# EAGLE board IOB-Adapter-Input_array (EAGLE 7.7.0)
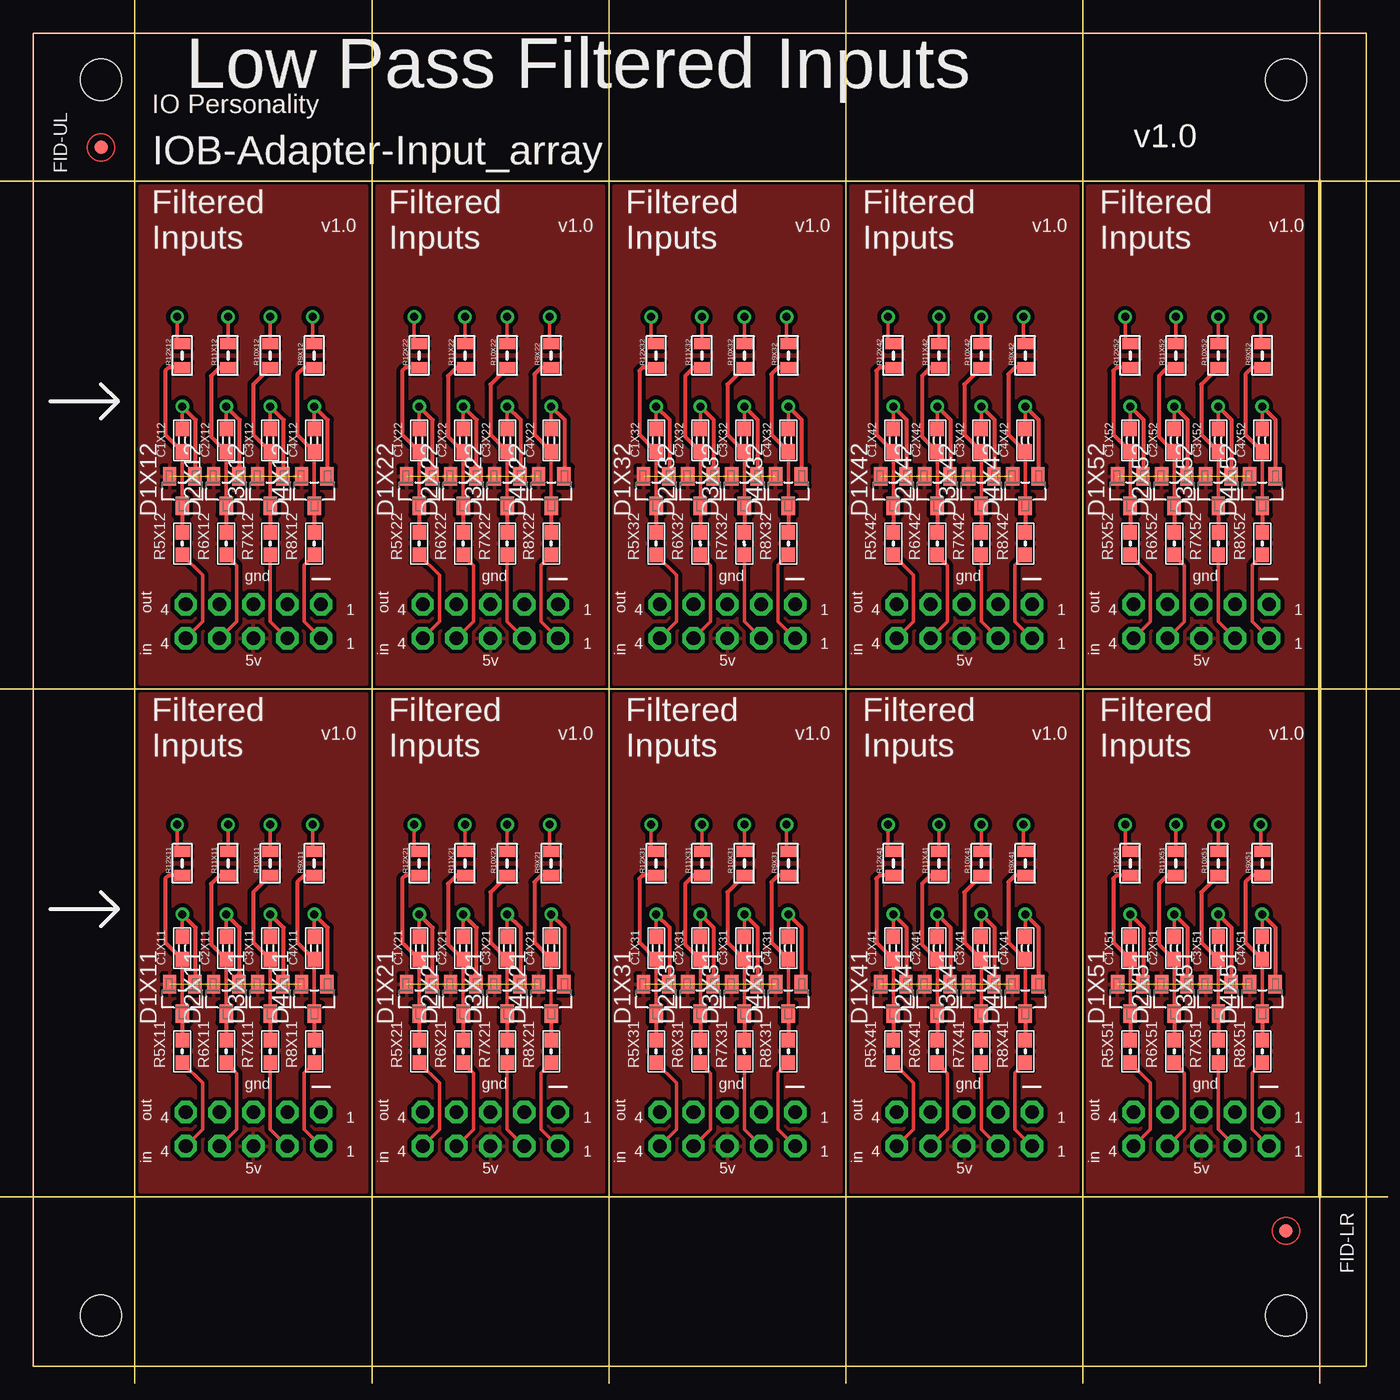
[diagram p0: board, top side]
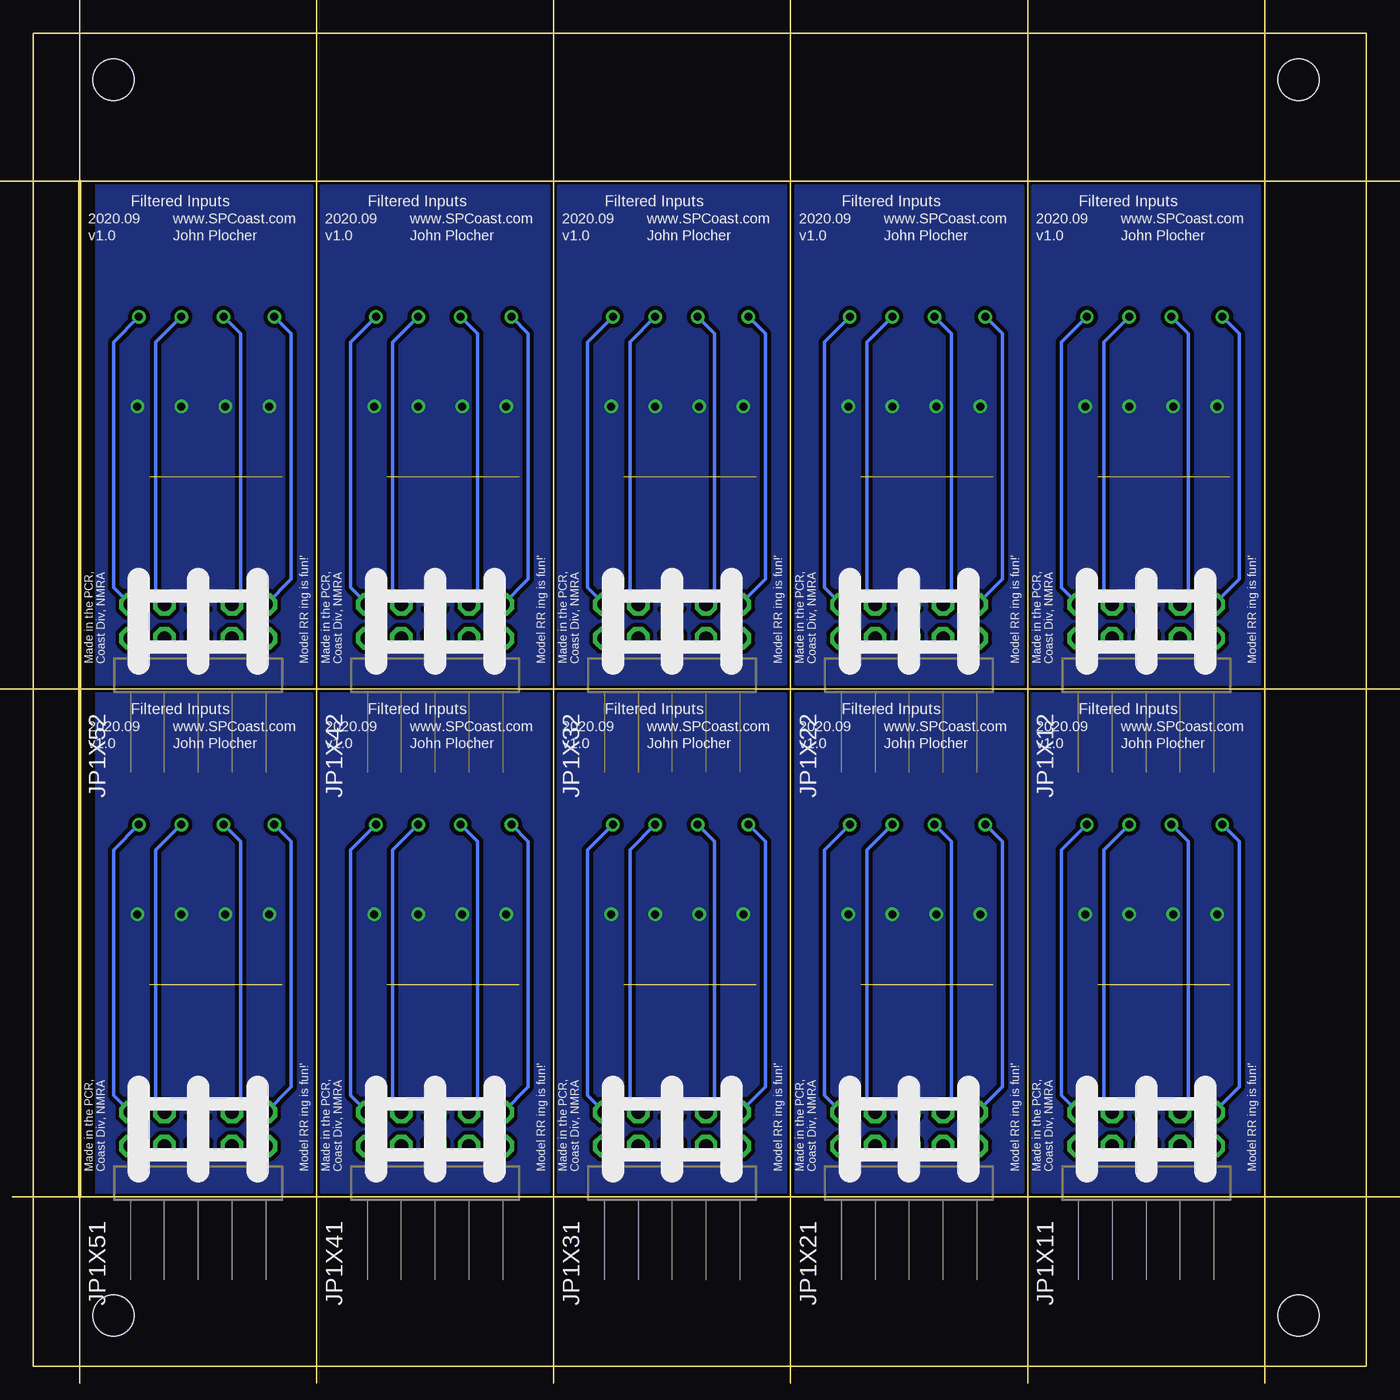
[diagram p1: board, bottom side, seen from below]

Size 100 x 100 mm. Coordinates in mm from the lower left corner, seen from the top.
Outline: 96.52,12.7 96.52,88.9
Copper layers (1*16): Top 0.035mm / dielectric 1.5mm / Bottom 0.035mm
Design rules "default": minimum track width 10mil, minimum drill 0.6mm, track to track 8mil, track to pad 8mil, pad to pad 8mil, via to via 8mil, smd to smd 8mil, copper to edge 40mil, drill to drill 8mil, minimum pad ring 10mil, minimum via ring 8mil, stop-mask expansion 4mil, vias tented up to drill 0mil, thermal gap 10mil

## Footprints (pad centres in the part's own frame; a part is rotated, then mirrored left to right if it is on the bottom)
0603-CAP = smd 1.1 x 1: 1 -0.85,0; 2 0.85,0
BOARD-DINRAIL-3.17IN-5X2-IOP = hole 3.1: 5.08,96.52; 93.98,96.52; 5.08,3.81; 93.98,3.81
SOT23 = smd 1.4 x 1: 1 1.1,-0.95; 2 1.1,0.95; 3 -1.1,0
FIDUCIAL_1MM = smd 1 x 1: 1 0,0
IOB-V3-MODULE = drill 1.016 pad 1.676 octagon: 1 -1.27,-5.08; 2 1.27,-5.08; 3 -1.27,-2.54; 4 1.27,-2.54; 5 -1.27,0; 6 1.27,0; 7 -1.27,2.54; 8 1.27,2.54; 9 -1.27,5.08; 10 1.27,5.08
0603-RES = smd 1.1 x 1: 1 -0.85,0; 2 0.85,0
0805-RES = smd 0.8 x 1.2: 1 -0.9,0; 2 0.9,0

## Placement (x,y rotation side)
C1X11  0.01uF  [0603-CAP]  11.18,31.37 90 top
C1X12  0.01uF  [0603-CAP]  11.18,69.47 90 top
C1X21  0.01uF  [0603-CAP]  28.96,31.37 90 top
C1X22  0.01uF  [0603-CAP]  28.96,69.47 90 top
C1X31  0.01uF  [0603-CAP]  46.74,31.37 90 top
C1X32  0.01uF  [0603-CAP]  46.74,69.47 90 top
C1X41  0.01uF  [0603-CAP]  64.52,31.37 90 top
C1X42  0.01uF  [0603-CAP]  64.52,69.47 90 top
C1X51  0.01uF  [0603-CAP]  82.3,31.37 90 top
C1X52  0.01uF  [0603-CAP]  82.3,69.47 90 top
C2X11  0.01uF  [0603-CAP]  14.48,31.37 90 top
C2X12  0.01uF  [0603-CAP]  14.48,69.47 90 top
C2X21  0.01uF  [0603-CAP]  32.26,31.37 90 top
C2X22  0.01uF  [0603-CAP]  32.26,69.47 90 top
C2X31  0.01uF  [0603-CAP]  50.04,31.37 90 top
C2X32  0.01uF  [0603-CAP]  50.04,69.47 90 top
C2X41  0.01uF  [0603-CAP]  67.82,31.37 90 top
C2X42  0.01uF  [0603-CAP]  67.82,69.47 90 top
C2X51  0.01uF  [0603-CAP]  85.6,31.37 90 top
C2X52  0.01uF  [0603-CAP]  85.6,69.47 90 top
C3X11  0.01uF  [0603-CAP]  17.78,31.37 90 top
C3X12  0.01uF  [0603-CAP]  17.78,69.47 90 top
C3X21  0.01uF  [0603-CAP]  35.56,31.37 90 top
C3X22  0.01uF  [0603-CAP]  35.56,69.47 90 top
C3X31  0.01uF  [0603-CAP]  53.34,31.37 90 top
C3X32  0.01uF  [0603-CAP]  53.34,69.47 90 top
C3X41  0.01uF  [0603-CAP]  71.12,31.37 90 top
C3X42  0.01uF  [0603-CAP]  71.12,69.47 90 top
C3X51  0.01uF  [0603-CAP]  88.9,31.37 90 top
C3X52  0.01uF  [0603-CAP]  88.9,69.47 90 top
C4X11  0.01uF  [0603-CAP]  21.08,31.37 90 top
C4X12  0.01uF  [0603-CAP]  21.08,69.47 90 top
C4X21  0.01uF  [0603-CAP]  38.86,31.37 90 top
C4X22  0.01uF  [0603-CAP]  38.86,69.47 90 top
C4X31  0.01uF  [0603-CAP]  56.64,31.37 90 top
C4X32  0.01uF  [0603-CAP]  56.64,69.47 90 top
C4X41  0.01uF  [0603-CAP]  74.42,31.37 90 top
C4X42  0.01uF  [0603-CAP]  74.42,69.47 90 top
C4X51  0.01uF  [0603-CAP]  92.2,31.37 90 top
C4X52  0.01uF  [0603-CAP]  92.2,69.47 90 top
CARRIER  BOARD  [BOARD-DINRAIL-3.17IN-5X2-IOP]  0,0 0 top
D1X11  BAT54S  [SOT23]  11.18,27.56 90 top
D1X12  BAT54S  [SOT23]  11.18,65.66 90 top
D1X21  BAT54S  [SOT23]  28.96,27.56 90 top
D1X22  BAT54S  [SOT23]  28.96,65.66 90 top
D1X31  BAT54S  [SOT23]  46.74,27.56 90 top
D1X32  BAT54S  [SOT23]  46.74,65.66 90 top
D1X41  BAT54S  [SOT23]  64.52,27.56 90 top
D1X42  BAT54S  [SOT23]  64.52,65.66 90 top
D1X51  BAT54S  [SOT23]  82.3,27.56 90 top
D1X52  BAT54S  [SOT23]  82.3,65.66 90 top
D2X11  BAT54S  [SOT23]  14.48,27.56 90 top
D2X12  BAT54S  [SOT23]  14.48,65.66 90 top
D2X21  BAT54S  [SOT23]  32.26,27.56 90 top
D2X22  BAT54S  [SOT23]  32.26,65.66 90 top
D2X31  BAT54S  [SOT23]  50.04,27.56 90 top
D2X32  BAT54S  [SOT23]  50.04,65.66 90 top
D2X41  BAT54S  [SOT23]  67.82,27.56 90 top
D2X42  BAT54S  [SOT23]  67.82,65.66 90 top
D2X51  BAT54S  [SOT23]  85.6,27.56 90 top
D2X52  BAT54S  [SOT23]  85.6,65.66 90 top
D3X11  BAT54S  [SOT23]  17.78,27.56 90 top
D3X12  BAT54S  [SOT23]  17.78,65.66 90 top
D3X21  BAT54S  [SOT23]  35.56,27.56 90 top
D3X22  BAT54S  [SOT23]  35.56,65.66 90 top
D3X31  BAT54S  [SOT23]  53.34,27.56 90 top
D3X32  BAT54S  [SOT23]  53.34,65.66 90 top
D3X41  BAT54S  [SOT23]  71.12,27.56 90 top
D3X42  BAT54S  [SOT23]  71.12,65.66 90 top
D3X51  BAT54S  [SOT23]  88.9,27.56 90 top
D3X52  BAT54S  [SOT23]  88.9,65.66 90 top
D4X11  BAT54S  [SOT23]  21.08,27.56 90 top
D4X12  BAT54S  [SOT23]  21.08,65.66 90 top
D4X21  BAT54S  [SOT23]  38.86,27.56 90 top
D4X22  BAT54S  [SOT23]  38.86,65.66 90 top
D4X31  BAT54S  [SOT23]  56.64,27.56 90 top
D4X32  BAT54S  [SOT23]  56.64,65.66 90 top
D4X41  BAT54S  [SOT23]  74.42,27.56 90 top
D4X42  BAT54S  [SOT23]  74.42,65.66 90 top
D4X51  BAT54S  [SOT23]  92.2,27.56 90 top
D4X52  BAT54S  [SOT23]  92.2,65.66 90 top
FID-LR  FIDUCIAL  [FIDUCIAL_1MM]  93.98,10.16 0 top
FID-UL  FIDUCIAL  [FIDUCIAL_1MM]  5.08,91.44 0 top
JP1X11  CONNECTOR-M05X2  [IOB-V3-MODULE]  16.51,17.78 270 bottom
JP1X12  CONNECTOR-M05X2  [IOB-V3-MODULE]  16.51,55.88 270 bottom
JP1X21  CONNECTOR-M05X2  [IOB-V3-MODULE]  34.29,17.78 270 bottom
JP1X22  CONNECTOR-M05X2  [IOB-V3-MODULE]  34.29,55.88 270 bottom
JP1X31  CONNECTOR-M05X2  [IOB-V3-MODULE]  52.07,17.78 270 bottom
JP1X32  CONNECTOR-M05X2  [IOB-V3-MODULE]  52.07,55.88 270 bottom
JP1X41  CONNECTOR-M05X2  [IOB-V3-MODULE]  69.85,17.78 270 bottom
JP1X42  CONNECTOR-M05X2  [IOB-V3-MODULE]  69.85,55.88 270 bottom
JP1X51  CONNECTOR-M05X2  [IOB-V3-MODULE]  87.63,17.78 270 bottom
JP1X52  CONNECTOR-M05X2  [IOB-V3-MODULE]  87.63,55.88 270 bottom
R5X11  1K0  [0603-RES]  11.18,23.62 90 top
R5X12  1K0  [0603-RES]  11.18,61.72 90 top
R5X21  1K0  [0603-RES]  28.96,23.62 90 top
R5X22  1K0  [0603-RES]  28.96,61.72 90 top
R5X31  1K0  [0603-RES]  46.74,23.62 90 top
R5X32  1K0  [0603-RES]  46.74,61.72 90 top
R5X41  1K0  [0603-RES]  64.52,23.62 90 top
R5X42  1K0  [0603-RES]  64.52,61.72 90 top
R5X51  1K0  [0603-RES]  82.3,23.62 90 top
R5X52  1K0  [0603-RES]  82.3,61.72 90 top
R6X11  1K0  [0603-RES]  14.48,23.62 90 top
R6X12  1K0  [0603-RES]  14.48,61.72 90 top
R6X21  1K0  [0603-RES]  32.26,23.62 90 top
R6X22  1K0  [0603-RES]  32.26,61.72 90 top
R6X31  1K0  [0603-RES]  50.04,23.62 90 top
R6X32  1K0  [0603-RES]  50.04,61.72 90 top
R6X41  1K0  [0603-RES]  67.82,23.62 90 top
R6X42  1K0  [0603-RES]  67.82,61.72 90 top
R6X51  1K0  [0603-RES]  85.6,23.62 90 top
R6X52  1K0  [0603-RES]  85.6,61.72 90 top
R7X11  1K0  [0603-RES]  17.78,23.62 90 top
R7X12  1K0  [0603-RES]  17.78,61.72 90 top
R7X21  1K0  [0603-RES]  35.56,23.62 90 top
R7X22  1K0  [0603-RES]  35.56,61.72 90 top
R7X31  1K0  [0603-RES]  53.34,23.62 90 top
R7X32  1K0  [0603-RES]  53.34,61.72 90 top
R7X41  1K0  [0603-RES]  71.12,23.62 90 top
R7X42  1K0  [0603-RES]  71.12,61.72 90 top
R7X51  1K0  [0603-RES]  88.9,23.62 90 top
R7X52  1K0  [0603-RES]  88.9,61.72 90 top
R8X11  1K0  [0603-RES]  21.08,23.62 90 top
R8X12  1K0  [0603-RES]  21.08,61.72 90 top
R8X21  1K0  [0603-RES]  38.86,23.62 90 top
R8X22  1K0  [0603-RES]  38.86,61.72 90 top
R8X31  1K0  [0603-RES]  56.64,23.62 90 top
R8X32  1K0  [0603-RES]  56.64,61.72 90 top
R8X41  1K0  [0603-RES]  74.42,23.62 90 top
R8X42  1K0  [0603-RES]  74.42,61.72 90 top
R8X51  1K0  [0603-RES]  92.2,23.62 90 top
R8X52  1K0  [0603-RES]  92.2,61.72 90 top
R9X11  82R  [0805-RES]  21.08,37.72 90 top
R9X12  82R  [0805-RES]  21.08,75.82 90 top
R9X21  82R  [0805-RES]  38.86,37.72 90 top
R9X22  82R  [0805-RES]  38.86,75.82 90 top
R9X31  82R  [0805-RES]  56.64,37.72 90 top
R9X32  82R  [0805-RES]  56.64,75.82 90 top
R9X41  82R  [0805-RES]  74.42,37.72 90 top
R9X42  82R  [0805-RES]  74.42,75.82 90 top
R9X51  82R  [0805-RES]  92.2,37.72 90 top
R9X52  82R  [0805-RES]  92.2,75.82 90 top
R10X11  82R  [0805-RES]  17.78,37.72 90 top
R10X12  82R  [0805-RES]  17.78,75.82 90 top
R10X21  82R  [0805-RES]  35.56,37.72 90 top
R10X22  82R  [0805-RES]  35.56,75.82 90 top
R10X31  82R  [0805-RES]  53.34,37.72 90 top
R10X32  82R  [0805-RES]  53.34,75.82 90 top
R10X41  82R  [0805-RES]  71.12,37.72 90 top
R10X42  82R  [0805-RES]  71.12,75.82 90 top
R10X51  82R  [0805-RES]  88.9,37.72 90 top
R10X52  82R  [0805-RES]  88.9,75.82 90 top
R11X11  82R  [0805-RES]  14.61,37.72 90 top
R11X12  82R  [0805-RES]  14.61,75.82 90 top
R11X21  82R  [0805-RES]  32.38,37.72 90 top
R11X22  82R  [0805-RES]  32.38,75.82 90 top
R11X31  82R  [0805-RES]  50.16,37.72 90 top
R11X32  82R  [0805-RES]  50.16,75.82 90 top
R11X41  82R  [0805-RES]  67.94,37.72 90 top
R11X42  82R  [0805-RES]  67.94,75.82 90 top
R11X51  82R  [0805-RES]  85.72,37.72 90 top
R11X52  82R  [0805-RES]  85.72,75.82 90 top
R12X11  82R  [0805-RES]  11.18,37.72 90 top
R12X12  82R  [0805-RES]  11.18,75.82 90 top
R12X21  82R  [0805-RES]  28.96,37.72 90 top
R12X22  82R  [0805-RES]  28.96,75.82 90 top
R12X31  82R  [0805-RES]  46.74,37.72 90 top
R12X32  82R  [0805-RES]  46.74,75.82 90 top
R12X41  82R  [0805-RES]  64.52,37.72 90 top
R12X42  82R  [0805-RES]  64.52,75.82 90 top
R12X51  82R  [0805-RES]  82.3,37.72 90 top
R12X52  82R  [0805-RES]  82.3,75.82 90 top

## Library data of the parts
C1X11 C1X12 C1X21 C1X22 C1X31 C1X32 C1X41 C1X42 C1X51 C1X52 C2X11 C2X12 C2X21 C2X22 C2X31 C2X32 C2X41 C2X42 C2X51 C2X52 C3X11 C3X12 C3X21 C3X22 C3X31 C3X32 C3X41 C3X42 C3X51 C3X52 C4X11 C4X12 C4X21 C4X22 C4X31 C4X32 C4X41 C4X42 C4X51 C4X52 CARRIER D1X11 D1X12 D1X21 D1X22 D1X31 D1X32 D1X41 D1X42 D1X51 D1X52 D2X11 D2X12 D2X21 D2X22 D2X31 D2X32 D2X41 D2X42 D2X51 D2X52 D3X11 D3X12 D3X21 D3X22 D3X31 D3X32 D3X41 D3X42 D3X51 D3X52 D4X11 D4X12 D4X21 D4X22 D4X31 D4X32 D4X41 D4X42 D4X51 D4X52 FID-LR FID-UL JP1X11 JP1X12 JP1X21 JP1X22 JP1X31 JP1X32 JP1X41 JP1X42 JP1X51 JP1X52 R5X11 R5X12 R5X21 R5X22 R5X31 R5X32 R5X41 R5X42 R5X51 R5X52 R6X11 R6X12 R6X21 R6X22 R6X31 R6X32 R6X41 R6X42 R6X51 R6X52 R7X11 R7X12 R7X21 R7X22 R7X31 R7X32 R7X41 R7X42 R7X51 R7X52 R8X11 R8X12 R8X21 R8X22 R8X31 R8X32 R8X41 R8X42 R8X51 R8X52 R9X11 R9X12 R9X21 R9X22 R9X31 R9X32 R9X41 R9X42 R9X51 R9X52 R10X11 R10X12 R10X21 R10X22 R10X31 R10X32 R10X41 R10X42 R10X51 R10X52 R11X11 R11X12 R11X21 R11X22 R11X31 R11X32 R11X41 R11X42 R11X51 R11X52 R12X11 R12X12 R12X21 R12X22 R12X31 R12X32 R12X41 R12X42 R12X51 R12X52 = SPCoast

## Nets
GNDX11: C1X11.2 C2X11.2 C3X11.2 C4X11.2 D1X11.1 D2X11.1 D3X11.1 D4X11.1 JP1X11.5
GNDX12: C1X12.2 C2X12.2 C3X12.2 C4X12.2 D1X12.1 D2X12.1 D3X12.1 D4X12.1 JP1X12.5
GNDX21: C1X21.2 C2X21.2 C3X21.2 C4X21.2 D1X21.1 D2X21.1 D3X21.1 D4X21.1 JP1X21.5
GNDX22: C1X22.2 C2X22.2 C3X22.2 C4X22.2 D1X22.1 D2X22.1 D3X22.1 D4X22.1 JP1X22.5
GNDX31: C1X31.2 C2X31.2 C3X31.2 C4X31.2 D1X31.1 D2X31.1 D3X31.1 D4X31.1 JP1X31.5
GNDX32: C1X32.2 C2X32.2 C3X32.2 C4X32.2 D1X32.1 D2X32.1 D3X32.1 D4X32.1 JP1X32.5
GNDX41: C1X41.2 C2X41.2 C3X41.2 C4X41.2 D1X41.1 D2X41.1 D3X41.1 D4X41.1 JP1X41.5
GNDX42: C1X42.2 C2X42.2 C3X42.2 C4X42.2 D1X42.1 D2X42.1 D3X42.1 D4X42.1 JP1X42.5
GNDX51: C1X51.2 C2X51.2 C3X51.2 C4X51.2 D1X51.1 D2X51.1 D3X51.1 D4X51.1 JP1X51.5
GNDX52: C1X52.2 C2X52.2 C3X52.2 C4X52.2 D1X52.1 D2X52.1 D3X52.1 D4X52.1 JP1X52.5
IO1X11: JP1X11.1 R9X11.2
IO1X12: JP1X12.1 R9X12.2
IO1X21: JP1X21.1 R9X21.2
IO1X22: JP1X22.1 R9X22.2
IO1X31: JP1X31.1 R9X31.2
IO1X32: JP1X32.1 R9X32.2
IO1X41: JP1X41.1 R9X41.2
IO1X42: JP1X42.1 R9X42.2
IO1X51: JP1X51.1 R9X51.2
IO1X52: JP1X52.1 R9X52.2
IO2X11: JP1X11.3 R10X11.2
IO2X12: JP1X12.3 R10X12.2
IO2X21: JP1X21.3 R10X21.2
IO2X22: JP1X22.3 R10X22.2
IO2X31: JP1X31.3 R10X31.2
IO2X32: JP1X32.3 R10X32.2
IO2X41: JP1X41.3 R10X41.2
IO2X42: JP1X42.3 R10X42.2
IO2X51: JP1X51.3 R10X51.2
IO2X52: JP1X52.3 R10X52.2
IO3X11: JP1X11.7 R11X11.2
IO3X12: JP1X12.7 R11X12.2
IO3X21: JP1X21.7 R11X21.2
IO3X22: JP1X22.7 R11X22.2
IO3X31: JP1X31.7 R11X31.2
IO3X32: JP1X32.7 R11X32.2
IO3X41: JP1X41.7 R11X41.2
IO3X42: JP1X42.7 R11X42.2
IO3X51: JP1X51.7 R11X51.2
IO3X52: JP1X52.7 R11X52.2
IO4X11: JP1X11.9 R12X11.2
IO4X12: JP1X12.9 R12X12.2
IO4X21: JP1X21.9 R12X21.2
IO4X22: JP1X22.9 R12X22.2
IO4X31: JP1X31.9 R12X31.2
IO4X32: JP1X32.9 R12X32.2
IO4X41: JP1X41.9 R12X41.2
IO4X42: JP1X42.9 R12X42.2
IO4X51: JP1X51.9 R12X51.2
IO4X52: JP1X52.9 R12X52.2
N$10X11: C1X11.1 D1X11.3 R5X11.2 R12X11.1
N$10X12: C1X12.1 D1X12.3 R5X12.2 R12X12.1
N$10X21: C1X21.1 D1X21.3 R5X21.2 R12X21.1
N$10X22: C1X22.1 D1X22.3 R5X22.2 R12X22.1
N$10X31: C1X31.1 D1X31.3 R5X31.2 R12X31.1
N$10X32: C1X32.1 D1X32.3 R5X32.2 R12X32.1
N$10X41: C1X41.1 D1X41.3 R5X41.2 R12X41.1
N$10X42: C1X42.1 D1X42.3 R5X42.2 R12X42.1
N$10X51: C1X51.1 D1X51.3 R5X51.2 R12X51.1
N$10X52: C1X52.1 D1X52.3 R5X52.2 R12X52.1
N$12X11: C2X11.1 D2X11.3 R6X11.2 R11X11.1
N$12X12: C2X12.1 D2X12.3 R6X12.2 R11X12.1
N$12X21: C2X21.1 D2X21.3 R6X21.2 R11X21.1
N$12X22: C2X22.1 D2X22.3 R6X22.2 R11X22.1
N$12X31: C2X31.1 D2X31.3 R6X31.2 R11X31.1
N$12X32: C2X32.1 D2X32.3 R6X32.2 R11X32.1
N$12X41: C2X41.1 D2X41.3 R6X41.2 R11X41.1
N$12X42: C2X42.1 D2X42.3 R6X42.2 R11X42.1
N$12X51: C2X51.1 D2X51.3 R6X51.2 R11X51.1
N$12X52: C2X52.1 D2X52.3 R6X52.2 R11X52.1
N$13X11: C3X11.1 D3X11.3 R7X11.2 R10X11.1
N$13X12: C3X12.1 D3X12.3 R7X12.2 R10X12.1
N$13X21: C3X21.1 D3X21.3 R7X21.2 R10X21.1
N$13X22: C3X22.1 D3X22.3 R7X22.2 R10X22.1
N$13X31: C3X31.1 D3X31.3 R7X31.2 R10X31.1
N$13X32: C3X32.1 D3X32.3 R7X32.2 R10X32.1
N$13X41: C3X41.1 D3X41.3 R7X41.2 R10X41.1
N$13X42: C3X42.1 D3X42.3 R7X42.2 R10X42.1
N$13X51: C3X51.1 D3X51.3 R7X51.2 R10X51.1
N$13X52: C3X52.1 D3X52.3 R7X52.2 R10X52.1
N$14X11: C4X11.1 D4X11.3 R8X11.2 R9X11.1
N$14X12: C4X12.1 D4X12.3 R8X12.2 R9X12.1
N$14X21: C4X21.1 D4X21.3 R8X21.2 R9X21.1
N$14X22: C4X22.1 D4X22.3 R8X22.2 R9X22.1
N$14X31: C4X31.1 D4X31.3 R8X31.2 R9X31.1
N$14X32: C4X32.1 D4X32.3 R8X32.2 R9X32.1
N$14X41: C4X41.1 D4X41.3 R8X41.2 R9X41.1
N$14X42: C4X42.1 D4X42.3 R8X42.2 R9X42.1
N$14X51: C4X51.1 D4X51.3 R8X51.2 R9X51.1
N$14X52: C4X52.1 D4X52.3 R8X52.2 R9X52.1
P1X11: JP1X11.2 R8X11.1
P1X12: JP1X12.2 R8X12.1
P1X21: JP1X21.2 R8X21.1
P1X22: JP1X22.2 R8X22.1
P1X31: JP1X31.2 R8X31.1
P1X32: JP1X32.2 R8X32.1
P1X41: JP1X41.2 R8X41.1
P1X42: JP1X42.2 R8X42.1
P1X51: JP1X51.2 R8X51.1
P1X52: JP1X52.2 R8X52.1
P2X11: JP1X11.4 R7X11.1
P2X12: JP1X12.4 R7X12.1
P2X21: JP1X21.4 R7X21.1
P2X22: JP1X22.4 R7X22.1
P2X31: JP1X31.4 R7X31.1
P2X32: JP1X32.4 R7X32.1
P2X41: JP1X41.4 R7X41.1
P2X42: JP1X42.4 R7X42.1
P2X51: JP1X51.4 R7X51.1
P2X52: JP1X52.4 R7X52.1
P3X11: JP1X11.8 R6X11.1
P3X12: JP1X12.8 R6X12.1
P3X21: JP1X21.8 R6X21.1
P3X22: JP1X22.8 R6X22.1
P3X31: JP1X31.8 R6X31.1
P3X32: JP1X32.8 R6X32.1
P3X41: JP1X41.8 R6X41.1
P3X42: JP1X42.8 R6X42.1
P3X51: JP1X51.8 R6X51.1
P3X52: JP1X52.8 R6X52.1
P4X11: JP1X11.10 R5X11.1
P4X12: JP1X12.10 R5X12.1
P4X21: JP1X21.10 R5X21.1
P4X22: JP1X22.10 R5X22.1
P4X31: JP1X31.10 R5X31.1
P4X32: JP1X32.10 R5X32.1
P4X41: JP1X41.10 R5X41.1
P4X42: JP1X42.10 R5X42.1
P4X51: JP1X51.10 R5X51.1
P4X52: JP1X52.10 R5X52.1
VCCX11: D1X11.2 D2X11.2 D3X11.2 D4X11.2 JP1X11.6
VCCX12: D1X12.2 D2X12.2 D3X12.2 D4X12.2 JP1X12.6
VCCX21: D1X21.2 D2X21.2 D3X21.2 D4X21.2 JP1X21.6
VCCX22: D1X22.2 D2X22.2 D3X22.2 D4X22.2 JP1X22.6
VCCX31: D1X31.2 D2X31.2 D3X31.2 D4X31.2 JP1X31.6
VCCX32: D1X32.2 D2X32.2 D3X32.2 D4X32.2 JP1X32.6
VCCX41: D1X41.2 D2X41.2 D3X41.2 D4X41.2 JP1X41.6
VCCX42: D1X42.2 D2X42.2 D3X42.2 D4X42.2 JP1X42.6
VCCX51: D1X51.2 D2X51.2 D3X51.2 D4X51.2 JP1X51.6
VCCX52: D1X52.2 D2X52.2 D3X52.2 D4X52.2 JP1X52.6

## Tracks (layer width: path | path; a pad name or v marks a point on that pad's centre or on a via)
GNDX11  (via drill 0.6 pad 1.01)
  Top 0.254: C4X11.2 v21.08,33.91 | v11.18,33.91 C1X11.2 | C2X11.2 v14.48,33.91 | C3X11.2 v17.78,33.91
  Top 0.305: D1X11.1 11.83,28.97 12.19,29.34 12.19,32.89 v11.18,33.91 | D2X11.1 15.13,29.1 15.49,29.46 15.49,32.89 v14.48,33.91 | D3X11.1 18.43,28.97 18.8,29.34 18.8,32.89 v17.78,33.91 | D4X11.1 21.73,28.97 22.1,29.34 22.1,32.89 v21.08,33.91
  pour Bottom (isolate 0.305): 8,13.08 8,50.42 25.02,50.42 25.02,13.08
GNDX12  (via drill 0.6 pad 1.01)
  Top 0.254: C4X12.2 v21.08,72.01 | v11.18,72.01 C1X12.2 | C2X12.2 v14.48,72.01 | C3X12.2 v17.78,72.01
  Top 0.305: D1X12.1 11.83,67.07 12.19,67.44 12.19,70.99 v11.18,72.01 | D2X12.1 15.13,67.2 15.49,67.56 15.49,70.99 v14.48,72.01 | D3X12.1 18.43,67.07 18.8,67.44 18.8,70.99 v17.78,72.01 | D4X12.1 21.73,67.07 22.1,67.44 22.1,70.99 v21.08,72.01
  pour Bottom (isolate 0.305): 8,51.18 8,88.52 25.02,88.52 25.02,51.18
GNDX21  (via drill 0.6 pad 1.01)
  Top 0.254: C4X21.2 v38.86,33.91 | v28.96,33.91 C1X21.2 | C2X21.2 v32.26,33.91 | C3X21.2 v35.56,33.91
  Top 0.305: D1X21.1 29.61,28.97 29.97,29.34 29.97,32.89 v28.96,33.91 | D2X21.1 32.91,29.1 33.27,29.46 33.27,32.89 v32.26,33.91 | D3X21.1 36.21,28.97 36.58,29.34 36.58,32.89 v35.56,33.91 | D4X21.1 39.51,28.97 39.88,29.34 39.88,32.89 v38.86,33.91
  pour Bottom (isolate 0.305): 25.78,13.08 25.78,50.42 42.8,50.42 42.8,13.08
GNDX22  (via drill 0.6 pad 1.01)
  Top 0.254: C4X22.2 v38.86,72.01 | v28.96,72.01 C1X22.2 | C2X22.2 v32.26,72.01 | C3X22.2 v35.56,72.01
  Top 0.305: D1X22.1 29.61,67.07 29.97,67.44 29.97,70.99 v28.96,72.01 | D2X22.1 32.91,67.2 33.27,67.56 33.27,70.99 v32.26,72.01 | D3X22.1 36.21,67.07 36.58,67.44 36.58,70.99 v35.56,72.01 | D4X22.1 39.51,67.07 39.88,67.44 39.88,70.99 v38.86,72.01
  pour Bottom (isolate 0.305): 25.78,51.18 25.78,88.52 42.8,88.52 42.8,51.18
GNDX31  (via drill 0.6 pad 1.01)
  Top 0.254: C4X31.2 v56.64,33.91 | v46.74,33.91 C1X31.2 | C2X31.2 v50.04,33.91 | C3X31.2 v53.34,33.91
  Top 0.305: D1X31.1 47.39,28.97 47.75,29.34 47.75,32.89 v46.74,33.91 | D2X31.1 50.69,29.1 51.05,29.46 51.05,32.89 v50.04,33.91 | D3X31.1 53.99,28.97 54.36,29.34 54.36,32.89 v53.34,33.91 | D4X31.1 57.29,28.97 57.66,29.34 57.66,32.89 v56.64,33.91
  pour Bottom (isolate 0.305): 43.56,13.08 43.56,50.42 60.58,50.42 60.58,13.08
GNDX32  (via drill 0.6 pad 1.01)
  Top 0.254: C4X32.2 v56.64,72.01 | v46.74,72.01 C1X32.2 | C2X32.2 v50.04,72.01 | C3X32.2 v53.34,72.01
  Top 0.305: D1X32.1 47.39,67.07 47.75,67.44 47.75,70.99 v46.74,72.01 | D2X32.1 50.69,67.2 51.05,67.56 51.05,70.99 v50.04,72.01 | D3X32.1 53.99,67.07 54.36,67.44 54.36,70.99 v53.34,72.01 | D4X32.1 57.29,67.07 57.66,67.44 57.66,70.99 v56.64,72.01
  pour Bottom (isolate 0.305): 43.56,51.18 43.56,88.52 60.58,88.52 60.58,51.18
GNDX41  (via drill 0.6 pad 1.01)
  Top 0.254: C4X41.2 v74.42,33.91 | v64.52,33.91 C1X41.2 | C2X41.2 v67.82,33.91 | C3X41.2 v71.12,33.91
  Top 0.305: D1X41.1 65.17,28.97 65.53,29.34 65.53,32.89 v64.52,33.91 | D2X41.1 68.47,29.1 68.83,29.46 68.83,32.89 v67.82,33.91 | D3X41.1 71.77,28.97 72.14,29.34 72.14,32.89 v71.12,33.91 | D4X41.1 75.07,28.97 75.44,29.34 75.44,32.89 v74.42,33.91
  pour Bottom (isolate 0.305): 61.34,13.08 61.34,50.42 78.36,50.42 78.36,13.08
GNDX42  (via drill 0.6 pad 1.01)
  Top 0.254: C4X42.2 v74.42,72.01 | v64.52,72.01 C1X42.2 | C2X42.2 v67.82,72.01 | C3X42.2 v71.12,72.01
  Top 0.305: D1X42.1 65.17,67.07 65.53,67.44 65.53,70.99 v64.52,72.01 | D2X42.1 68.47,67.2 68.83,67.56 68.83,70.99 v67.82,72.01 | D3X42.1 71.77,67.07 72.14,67.44 72.14,70.99 v71.12,72.01 | D4X42.1 75.07,67.07 75.44,67.44 75.44,70.99 v74.42,72.01
  pour Bottom (isolate 0.305): 61.34,51.18 61.34,88.52 78.36,88.52 78.36,51.18
GNDX51  (via drill 0.6 pad 1.01)
  Top 0.254: C4X51.2 v92.2,33.91 | v82.3,33.91 C1X51.2 | C2X51.2 v85.6,33.91 | C3X51.2 v88.9,33.91
  Top 0.305: D1X51.1 82.95,28.97 83.31,29.34 83.31,32.89 v82.3,33.91 | D2X51.1 86.25,29.1 86.61,29.46 86.61,32.89 v85.6,33.91 | D3X51.1 89.55,28.97 89.92,29.34 89.92,32.89 v88.9,33.91 | D4X51.1 92.85,28.97 93.22,29.34 93.22,32.89 v92.2,33.91
  pour Bottom (isolate 0.305): 79.12,13.08 79.12,50.42 96.14,50.42 96.14,13.08
GNDX52  (via drill 0.6 pad 1.01)
  Top 0.254: C4X52.2 v92.2,72.01 | v82.3,72.01 C1X52.2 | C2X52.2 v85.6,72.01 | C3X52.2 v88.9,72.01
  Top 0.305: D1X52.1 82.95,67.07 83.31,67.44 83.31,70.99 v82.3,72.01 | D2X52.1 86.25,67.2 86.61,67.56 86.61,70.99 v85.6,72.01 | D3X52.1 89.55,67.07 89.92,67.44 89.92,70.99 v88.9,72.01 | D4X52.1 92.85,67.07 93.22,67.44 93.22,70.99 v92.2,72.01
  pour Bottom (isolate 0.305): 79.12,51.18 79.12,88.52 96.14,88.52 96.14,51.18
IO1X11  (via drill 0.6 pad 1.01)
  Top 0.254: R9X11.2 20.95,38.75 v20.95,40.64
  Bottom 0.254: v20.95,40.64 22.86,38.73 22.86,20.32 JP1X11.1
IO1X12  (via drill 0.6 pad 1.01)
  Top 0.254: R9X12.2 20.95,76.85 v20.95,78.74
  Bottom 0.254: v20.95,78.74 22.86,76.83 22.86,58.42 JP1X12.1
IO1X21  (via drill 0.6 pad 1.01)
  Top 0.254: R9X21.2 38.73,38.75 v38.73,40.64
  Bottom 0.254: v38.73,40.64 40.64,38.73 40.64,20.32 JP1X21.1
IO1X22  (via drill 0.6 pad 1.01)
  Top 0.254: R9X22.2 38.73,76.85 v38.73,78.74
  Bottom 0.254: v38.73,78.74 40.64,76.83 40.64,58.42 JP1X22.1
IO1X31  (via drill 0.6 pad 1.01)
  Top 0.254: R9X31.2 56.52,38.75 v56.52,40.64
  Bottom 0.254: v56.52,40.64 58.42,38.73 58.42,20.32 JP1X31.1
IO1X32  (via drill 0.6 pad 1.01)
  Top 0.254: R9X32.2 56.52,76.85 v56.52,78.74
  Bottom 0.254: v56.52,78.74 58.42,76.83 58.42,58.42 JP1X32.1
IO1X41  (via drill 0.6 pad 1.01)
  Top 0.254: R9X41.2 74.3,38.75 v74.3,40.64
  Bottom 0.254: v74.3,40.64 76.2,38.73 76.2,20.32 JP1X41.1
IO1X42  (via drill 0.6 pad 1.01)
  Top 0.254: R9X42.2 74.3,76.85 v74.3,78.74
  Bottom 0.254: v74.3,78.74 76.2,76.83 76.2,58.42 JP1X42.1
IO1X51  (via drill 0.6 pad 1.01)
  Top 0.254: R9X51.2 92.08,38.75 v92.08,40.64
  Bottom 0.254: v92.08,40.64 93.98,38.73 93.98,20.32 JP1X51.1
IO1X52  (via drill 0.6 pad 1.01)
  Top 0.254: R9X52.2 92.08,76.85 v92.08,78.74
  Bottom 0.254: v92.08,78.74 93.98,76.83 93.98,58.42 JP1X52.1
IO2X11  (via drill 0.6 pad 1.01)
  Top 0.254: R10X11.2 v17.78,40.64
  Bottom 0.254: v17.78,40.64 19.68,38.73 19.68,19.68 JP1X11.3
IO2X12  (via drill 0.6 pad 1.01)
  Top 0.254: R10X12.2 v17.78,78.74
  Bottom 0.254: v17.78,78.74 19.68,76.83 19.68,57.78 JP1X12.3
IO2X21  (via drill 0.6 pad 1.01)
  Top 0.254: R10X21.2 v35.56,40.64
  Bottom 0.254: v35.56,40.64 37.47,38.73 37.47,19.68 JP1X21.3
IO2X22  (via drill 0.6 pad 1.01)
  Top 0.254: R10X22.2 v35.56,78.74
  Bottom 0.254: v35.56,78.74 37.47,76.83 37.47,57.78 JP1X22.3
IO2X31  (via drill 0.6 pad 1.01)
  Top 0.254: R10X31.2 v53.34,40.64
  Bottom 0.254: v53.34,40.64 55.24,38.73 55.24,19.68 JP1X31.3
IO2X32  (via drill 0.6 pad 1.01)
  Top 0.254: R10X32.2 v53.34,78.74
  Bottom 0.254: v53.34,78.74 55.24,76.83 55.24,57.78 JP1X32.3
IO2X41  (via drill 0.6 pad 1.01)
  Top 0.254: R10X41.2 v71.12,40.64
  Bottom 0.254: v71.12,40.64 73.03,38.73 73.03,19.68 JP1X41.3
IO2X42  (via drill 0.6 pad 1.01)
  Top 0.254: R10X42.2 v71.12,78.74
  Bottom 0.254: v71.12,78.74 73.03,76.83 73.03,57.78 JP1X42.3
IO2X51  (via drill 0.6 pad 1.01)
  Top 0.254: R10X51.2 v88.9,40.64
  Bottom 0.254: v88.9,40.64 90.81,38.73 90.81,19.68 JP1X51.3
IO2X52  (via drill 0.6 pad 1.01)
  Top 0.254: R10X52.2 v88.9,78.74
  Bottom 0.254: v88.9,78.74 90.81,76.83 90.81,57.78 JP1X52.3
IO3X11  (via drill 0.6 pad 1.01)
  Top 0.254: R11X11.2 v14.61,40.64
  Bottom 0.254: v14.61,40.64 13.34,39.37 13.34,19.68 JP1X11.7
IO3X12  (via drill 0.6 pad 1.01)
  Top 0.254: R11X12.2 v14.61,78.74
  Bottom 0.254: v14.61,78.74 13.34,77.47 13.34,57.78 JP1X12.7
IO3X21  (via drill 0.6 pad 1.01)
  Top 0.254: R11X21.2 v32.38,40.64
  Bottom 0.254: v32.38,40.64 31.11,39.37 31.11,19.68 JP1X21.7
IO3X22  (via drill 0.6 pad 1.01)
  Top 0.254: R11X22.2 v32.38,78.74
  Bottom 0.254: v32.38,78.74 31.11,77.47 31.11,57.78 JP1X22.7
IO3X31  (via drill 0.6 pad 1.01)
  Top 0.254: R11X31.2 v50.16,40.64
  Bottom 0.254: v50.16,40.64 48.9,39.37 48.9,19.68 JP1X31.7
IO3X32  (via drill 0.6 pad 1.01)
  Top 0.254: R11X32.2 v50.16,78.74
  Bottom 0.254: v50.16,78.74 48.9,77.47 48.9,57.78 JP1X32.7
IO3X41  (via drill 0.6 pad 1.01)
  Top 0.254: R11X41.2 v67.94,40.64
  Bottom 0.254: v67.94,40.64 66.67,39.37 66.67,19.68 JP1X41.7
IO3X42  (via drill 0.6 pad 1.01)
  Top 0.254: R11X42.2 v67.94,78.74
  Bottom 0.254: v67.94,78.74 66.67,77.47 66.67,57.78 JP1X42.7
IO3X51  (via drill 0.6 pad 1.01)
  Top 0.254: R11X51.2 v85.72,40.64
  Bottom 0.254: v85.72,40.64 84.45,39.37 84.45,19.68 JP1X51.7
IO3X52  (via drill 0.6 pad 1.01)
  Top 0.254: R11X52.2 v85.72,78.74
  Bottom 0.254: v85.72,78.74 84.45,77.47 84.45,57.78 JP1X52.7
IO4X11  (via drill 0.6 pad 1.01)
  Top 0.254: R12X11.2 10.79,39 v10.79,40.64
  Bottom 0.254: v10.79,40.64 9.53,39.37 9.53,20.95 JP1X11.9
IO4X12  (via drill 0.6 pad 1.01)
  Top 0.254: R12X12.2 10.79,77.1 v10.79,78.74
  Bottom 0.254: v10.79,78.74 9.53,77.47 9.53,59.05 JP1X12.9
IO4X21  (via drill 0.6 pad 1.01)
  Top 0.254: R12X21.2 28.57,39 v28.57,40.64
  Bottom 0.254: v28.57,40.64 27.3,39.37 27.3,20.95 JP1X21.9
IO4X22  (via drill 0.6 pad 1.01)
  Top 0.254: R12X22.2 28.57,77.1 v28.57,78.74
  Bottom 0.254: v28.57,78.74 27.3,77.47 27.3,59.05 JP1X22.9
IO4X31  (via drill 0.6 pad 1.01)
  Top 0.254: R12X31.2 46.35,39 v46.35,40.64
  Bottom 0.254: v46.35,40.64 45.09,39.37 45.09,20.95 JP1X31.9
IO4X32  (via drill 0.6 pad 1.01)
  Top 0.254: R12X32.2 46.35,77.1 v46.35,78.74
  Bottom 0.254: v46.35,78.74 45.09,77.47 45.09,59.05 JP1X32.9
IO4X41  (via drill 0.6 pad 1.01)
  Top 0.254: R12X41.2 64.14,39 v64.14,40.64
  Bottom 0.254: v64.14,40.64 62.87,39.37 62.87,20.95 JP1X41.9
IO4X42  (via drill 0.6 pad 1.01)
  Top 0.254: R12X42.2 64.14,77.1 v64.14,78.74
  Bottom 0.254: v64.14,78.74 62.87,77.47 62.87,59.05 JP1X42.9
IO4X51  (via drill 0.6 pad 1.01)
  Top 0.254: R12X51.2 81.92,39 v81.92,40.64
  Bottom 0.254: v81.92,40.64 80.64,39.37 80.64,20.95 JP1X51.9
IO4X52  (via drill 0.6 pad 1.01)
  Top 0.254: R12X52.2 81.92,77.1 v81.92,78.74
  Bottom 0.254: v81.92,78.74 80.64,77.47 80.64,59.05 JP1X52.9
N$10X11
  Top 0.254: D1X11.3 C1X11.1
  Top 0.305: D1X11.3 R5X11.2 | R12X11.1 10.16,36.83 9.91,36.58 9.91,31.79 C1X11.1
N$10X12
  Top 0.254: D1X12.3 C1X12.1
  Top 0.305: D1X12.3 R5X12.2 | R12X12.1 10.16,74.93 9.91,74.68 9.91,69.89 C1X12.1
N$10X21
  Top 0.254: D1X21.3 C1X21.1
  Top 0.305: D1X21.3 R5X21.2 | R12X21.1 27.94,36.83 27.69,36.58 27.69,31.79 C1X21.1
N$10X22
  Top 0.254: D1X22.3 C1X22.1
  Top 0.305: D1X22.3 R5X22.2 | R12X22.1 27.94,74.93 27.69,74.68 27.69,69.89 C1X22.1
N$10X31
  Top 0.254: D1X31.3 C1X31.1
  Top 0.305: D1X31.3 R5X31.2 | R12X31.1 45.72,36.83 45.47,36.58 45.47,31.79 C1X31.1
N$10X32
  Top 0.254: D1X32.3 C1X32.1
  Top 0.305: D1X32.3 R5X32.2 | R12X32.1 45.72,74.93 45.47,74.68 45.47,69.89 C1X32.1
N$10X41
  Top 0.254: D1X41.3 C1X41.1
  Top 0.305: D1X41.3 R5X41.2 | R12X41.1 63.5,36.83 63.25,36.58 63.25,31.79 C1X41.1
N$10X42
  Top 0.254: D1X42.3 C1X42.1
  Top 0.305: D1X42.3 R5X42.2 | R12X42.1 63.5,74.93 63.25,74.68 63.25,69.89 C1X42.1
N$10X51
  Top 0.254: D1X51.3 C1X51.1
  Top 0.305: D1X51.3 R5X51.2 | R12X51.1 81.28,36.83 81.03,36.58 81.03,31.79 C1X51.1
N$10X52
  Top 0.254: D1X52.3 C1X52.1
  Top 0.305: D1X52.3 R5X52.2 | R12X52.1 81.28,74.93 81.03,74.68 81.03,69.89 C1X52.1
N$12X11
  Top 0.254: C2X11.1 D2X11.3
  Top 0.305: D2X11.3 R6X11.2 | R11X11.1 13.97,36.83 13.34,36.2 13.34,31.66 C2X11.1
N$12X12
  Top 0.254: C2X12.1 D2X12.3
  Top 0.305: D2X12.3 R6X12.2 | R11X12.1 13.97,74.93 13.34,74.3 13.34,69.76 C2X12.1
N$12X21
  Top 0.254: C2X21.1 D2X21.3
  Top 0.305: D2X21.3 R6X21.2 | R11X21.1 31.75,36.83 31.11,36.2 31.11,31.66 C2X21.1
N$12X22
  Top 0.254: C2X22.1 D2X22.3
  Top 0.305: D2X22.3 R6X22.2 | R11X22.1 31.75,74.93 31.11,74.3 31.11,69.76 C2X22.1
N$12X31
  Top 0.254: C2X31.1 D2X31.3
  Top 0.305: D2X31.3 R6X31.2 | R11X31.1 49.53,36.83 48.9,36.2 48.9,31.66 C2X31.1
N$12X32
  Top 0.254: C2X32.1 D2X32.3
  Top 0.305: D2X32.3 R6X32.2 | R11X32.1 49.53,74.93 48.9,74.3 48.9,69.76 C2X32.1
N$12X41
  Top 0.254: C2X41.1 D2X41.3
  Top 0.305: D2X41.3 R6X41.2 | R11X41.1 67.31,36.83 66.67,36.2 66.67,31.66 C2X41.1
N$12X42
  Top 0.254: C2X42.1 D2X42.3
  Top 0.305: D2X42.3 R6X42.2 | R11X42.1 67.31,74.93 66.67,74.3 66.67,69.76 C2X42.1
N$12X51
  Top 0.254: C2X51.1 D2X51.3
  Top 0.305: D2X51.3 R6X51.2 | R11X51.1 85.09,36.83 84.45,36.2 84.45,31.66 C2X51.1
N$12X52
  Top 0.254: C2X52.1 D2X52.3
  Top 0.305: D2X52.3 R6X52.2 | R11X52.1 85.09,74.93 84.45,74.3 84.45,69.76 C2X52.1
N$13X11
  Top 0.254: C3X11.1 D3X11.3
  Top 0.305: D3X11.3 R7X11.2 | R10X11.1 17.14,36.2 16.51,35.56 16.51,31.79 C3X11.1
N$13X12
  Top 0.254: C3X12.1 D3X12.3
  Top 0.305: D3X12.3 R7X12.2 | R10X12.1 17.14,74.3 16.51,73.66 16.51,69.89 C3X12.1
N$13X21
  Top 0.254: C3X21.1 D3X21.3
  Top 0.305: D3X21.3 R7X21.2 | R10X21.1 34.92,36.2 34.29,35.56 34.29,31.79 C3X21.1
N$13X22
  Top 0.254: C3X22.1 D3X22.3
  Top 0.305: D3X22.3 R7X22.2 | R10X22.1 34.92,74.3 34.29,73.66 34.29,69.89 C3X22.1
N$13X31
  Top 0.254: C3X31.1 D3X31.3
  Top 0.305: D3X31.3 R7X31.2 | R10X31.1 52.7,36.2 52.07,35.56 52.07,31.79 C3X31.1
N$13X32
  Top 0.254: C3X32.1 D3X32.3
  Top 0.305: D3X32.3 R7X32.2 | R10X32.1 52.7,74.3 52.07,73.66 52.07,69.89 C3X32.1
N$13X41
  Top 0.254: C3X41.1 D3X41.3
  Top 0.305: D3X41.3 R7X41.2 | R10X41.1 70.48,36.2 69.85,35.56 69.85,31.79 C3X41.1
N$13X42
  Top 0.254: C3X42.1 D3X42.3
  Top 0.305: D3X42.3 R7X42.2 | R10X42.1 70.48,74.3 69.85,73.66 69.85,69.89 C3X42.1
N$13X51
  Top 0.254: C3X51.1 D3X51.3
  Top 0.305: D3X51.3 R7X51.2 | R10X51.1 88.27,36.2 87.63,35.56 87.63,31.79 C3X51.1
N$13X52
  Top 0.254: C3X52.1 D3X52.3
  Top 0.305: D3X52.3 R7X52.2 | R10X52.1 88.27,74.3 87.63,73.66 87.63,69.89 C3X52.1
N$14X11
  Top 0.254: C4X11.1 D4X11.3
  Top 0.305: D4X11.3 R8X11.2 | R9X11.1 20.32,36.83 19.81,36.32 19.81,31.79 C4X11.1
N$14X12
  Top 0.254: C4X12.1 D4X12.3
  Top 0.305: D4X12.3 R8X12.2 | R9X12.1 20.32,74.93 19.81,74.42 19.81,69.89 C4X12.1
N$14X21
  Top 0.254: C4X21.1 D4X21.3
  Top 0.305: D4X21.3 R8X21.2 | R9X21.1 38.1,36.83 37.59,36.32 37.59,31.79 C4X21.1
N$14X22
  Top 0.254: C4X22.1 D4X22.3
  Top 0.305: D4X22.3 R8X22.2 | R9X22.1 38.1,74.93 37.59,74.42 37.59,69.89 C4X22.1
N$14X31
  Top 0.254: C4X31.1 D4X31.3
  Top 0.305: D4X31.3 R8X31.2 | R9X31.1 55.88,36.83 55.37,36.32 55.37,31.79 C4X31.1
N$14X32
  Top 0.254: C4X32.1 D4X32.3
  Top 0.305: D4X32.3 R8X32.2 | R9X32.1 55.88,74.93 55.37,74.42 55.37,69.89 C4X32.1
N$14X41
  Top 0.254: C4X41.1 D4X41.3
  Top 0.305: D4X41.3 R8X41.2 | R9X41.1 73.66,36.83 73.15,36.32 73.15,31.79 C4X41.1
N$14X42
  Top 0.254: C4X42.1 D4X42.3
  Top 0.305: D4X42.3 R8X42.2 | R9X42.1 73.66,74.93 73.15,74.42 73.15,69.89 C4X42.1
N$14X51
  Top 0.254: C4X51.1 D4X51.3
  Top 0.305: D4X51.3 R8X51.2 | R9X51.1 91.44,36.83 90.93,36.32 90.93,31.79 C4X51.1
N$14X52
  Top 0.254: C4X52.1 D4X52.3
  Top 0.305: D4X52.3 R8X52.2 | R9X52.1 91.44,74.93 90.93,74.42 90.93,69.89 C4X52.1
P1X11
  Top 0.254: JP1X11.2 20.32,17.78 20.32,22.01 R8X11.1
P1X12
  Top 0.254: JP1X12.2 20.32,55.88 20.32,60.11 R8X12.1
P1X21
  Top 0.254: JP1X21.2 38.1,17.78 38.1,22.01 R8X21.1
P1X22
  Top 0.254: JP1X22.2 38.1,55.88 38.1,60.11 R8X22.1
P1X31
  Top 0.254: JP1X31.2 55.88,17.78 55.88,22.01 R8X31.1
P1X32
  Top 0.254: JP1X32.2 55.88,55.88 55.88,60.11 R8X32.1
P1X41
  Top 0.254: JP1X41.2 73.66,17.78 73.66,22.01 R8X41.1
P1X42
  Top 0.254: JP1X42.2 73.66,55.88 73.66,60.11 R8X42.1
P1X51
  Top 0.254: JP1X51.2 91.44,17.78 91.44,22.01 R8X51.1
P1X52
  Top 0.254: JP1X52.2 91.44,55.88 91.44,60.11 R8X52.1
P2X11
  Top 0.254: JP1X11.4 17.78,17.78 R7X11.1
  Top 0.305: R7X11.1 17.53,22.47
P2X12
  Top 0.254: JP1X12.4 17.78,55.88 R7X12.1
  Top 0.305: R7X12.1 17.53,60.57
P2X21
  Top 0.254: JP1X21.4 35.56,17.78 R7X21.1
  Top 0.305: R7X21.1 35.31,22.47
P2X22
  Top 0.254: JP1X22.4 35.56,55.88 R7X22.1
  Top 0.305: R7X22.1 35.31,60.57
P2X31
  Top 0.254: JP1X31.4 53.34,17.78 R7X31.1
  Top 0.305: R7X31.1 53.09,22.47
P2X32
  Top 0.254: JP1X32.4 53.34,55.88 R7X32.1
  Top 0.305: R7X32.1 53.09,60.57
P2X41
  Top 0.254: JP1X41.4 71.12,17.78 R7X41.1
  Top 0.305: R7X41.1 70.87,22.47
P2X42
  Top 0.254: JP1X42.4 71.12,55.88 R7X42.1
  Top 0.305: R7X42.1 70.87,60.57
P2X51
  Top 0.254: JP1X51.4 88.9,17.78 R7X51.1
  Top 0.305: R7X51.1 88.65,22.47
P2X52
  Top 0.254: JP1X52.4 88.9,55.88 R7X52.1
  Top 0.305: R7X52.1 88.65,60.57
P3X11
  Top 0.254: JP1X11.8 15.24,17.78 15.24,21.96 14.99,22.21
  Top 0.305: R6X11.1 14.99,22.21
P3X12
  Top 0.254: JP1X12.8 15.24,55.88 15.24,60.06 14.99,60.31
  Top 0.305: R6X12.1 14.99,60.31
P3X21
  Top 0.254: JP1X21.8 33.02,17.78 33.02,21.96 32.77,22.21
  Top 0.305: R6X21.1 32.77,22.21
P3X22
  Top 0.254: JP1X22.8 33.02,55.88 33.02,60.06 32.77,60.31
  Top 0.305: R6X22.1 32.77,60.31
P3X31
  Top 0.254: JP1X31.8 50.8,17.78 50.8,21.96 50.55,22.21
  Top 0.305: R6X31.1 50.55,22.21
P3X32
  Top 0.254: JP1X32.8 50.8,55.88 50.8,60.06 50.55,60.31
  Top 0.305: R6X32.1 50.55,60.31
P3X41
  Top 0.254: JP1X41.8 68.58,17.78 68.58,21.96 68.33,22.21
  Top 0.305: R6X41.1 68.33,22.21
P3X42
  Top 0.254: JP1X42.8 68.58,55.88 68.58,60.06 68.33,60.31
  Top 0.305: R6X42.1 68.33,60.31
P3X51
  Top 0.254: JP1X51.8 86.36,17.78 86.36,21.96 86.11,22.21
  Top 0.305: R6X51.1 86.11,22.21
P3X52
  Top 0.254: JP1X52.8 86.36,55.88 86.36,60.06 86.11,60.31
  Top 0.305: R6X52.1 86.11,60.31
P4X11
  Top 0.254: JP1X11.10 12.7,17.78 12.7,21.25 R5X11.1
P4X12
  Top 0.254: JP1X12.10 12.7,55.88 12.7,59.35 R5X12.1
P4X21
  Top 0.254: JP1X21.10 30.48,17.78 30.48,21.25 R5X21.1
P4X22
  Top 0.254: JP1X22.10 30.48,55.88 30.48,59.35 R5X22.1
P4X31
  Top 0.254: JP1X31.10 48.26,17.78 48.26,21.25 R5X31.1
P4X32
  Top 0.254: JP1X32.10 48.26,55.88 48.26,59.35 R5X32.1
P4X41
  Top 0.254: JP1X41.10 66.04,17.78 66.04,21.25 R5X41.1
P4X42
  Top 0.254: JP1X42.10 66.04,55.88 66.04,59.35 R5X42.1
P4X51
  Top 0.254: JP1X51.10 83.82,17.78 83.82,21.25 R5X51.1
P4X52
  Top 0.254: JP1X52.10 83.82,55.88 83.82,59.35 R5X52.1
VCCX11  (3 unrouted)
  pour Top (isolate 0.305): 8,13.08 8,50.42 25.02,50.42 25.02,13.08
VCCX12  (3 unrouted)
  pour Top (isolate 0.305): 8,51.18 8,88.52 25.02,88.52 25.02,51.18
VCCX21  (3 unrouted)
  pour Top (isolate 0.305): 25.78,13.08 25.78,50.42 42.8,50.42 42.8,13.08
VCCX22  (3 unrouted)
  pour Top (isolate 0.305): 25.78,51.18 25.78,88.52 42.8,88.52 42.8,51.18
VCCX31  (3 unrouted)
  pour Top (isolate 0.305): 43.56,13.08 43.56,50.42 60.58,50.42 60.58,13.08
VCCX32  (3 unrouted)
  pour Top (isolate 0.305): 43.56,51.18 43.56,88.52 60.58,88.52 60.58,51.18
VCCX41  (3 unrouted)
  pour Top (isolate 0.305): 61.34,13.08 61.34,50.42 78.36,50.42 78.36,13.08
VCCX42  (3 unrouted)
  pour Top (isolate 0.305): 61.34,51.18 61.34,88.52 78.36,88.52 78.36,51.18
VCCX51  (3 unrouted)
  pour Top (isolate 0.305): 79.12,13.08 79.12,50.42 96.14,50.42 96.14,13.08
VCCX52  (3 unrouted)
  pour Top (isolate 0.305): 79.12,51.18 79.12,88.52 96.14,88.52 96.14,51.18

## Text on the board
tPlace: Low Pass Filtered Inputs | v1.0 | v1.0 | v1.0 | v1.0 | v1.0 | v1.0 | Filtered / Inputs | Filtered / Inputs | Filtered / Inputs | Filtered / Inputs | Filtered / Inputs | v1.0 | v1.0 | v1.0 | v1.0 | v1.0 | Filtered / Inputs | Filtered / Inputs | Filtered / Inputs | Filtered / Inputs | Filtered / Inputs
bPlace: Filtered Inputs | Filtered Inputs | Filtered Inputs | Filtered Inputs | Filtered Inputs | www.SPCoast.com | 2020.09 | www.SPCoast.com | 2020.09 | www.SPCoast.com | 2020.09 | www.SPCoast.com | 2020.09 | www.SPCoast.com | 2020.09 | John Plocher | v1.0 | John Plocher | v1.0 | John Plocher | v1.0 | John Plocher | v1.0 | John Plocher | v1.0 | Model RR ing is fun!' | Made in the PCR, / Coast Div, NMRA | Model RR ing is fun!' | Made in the PCR, / Coast Div, NMRA | Model RR ing is fun!' | Made in the PCR, / Coast Div, NMRA | Model RR ing is fun!' | Made in the PCR, / Coast Div, NMRA | Model RR ing is fun!' | Made in the PCR, / Coast Div, NMRA | Filtered Inputs | Filtered Inputs | Filtered Inputs | Filtered Inputs | Filtered Inputs | www.SPCoast.com | 2020.09 | www.SPCoast.com | 2020.09 | www.SPCoast.com | 2020.09 | www.SPCoast.com | 2020.09 | www.SPCoast.com | 2020.09 | John Plocher | v1.0 | John Plocher | v1.0 | John Plocher | v1.0 | John Plocher | v1.0 | John Plocher | v1.0 | Model RR ing is fun!' | Made in the PCR, / Coast Div, NMRA | Model RR ing is fun!' | Made in the PCR, / Coast Div, NMRA | Model RR ing is fun!' | Made in the PCR, / Coast Div, NMRA | Model RR ing is fun!' | Made in the PCR, / Coast Div, NMRA | Model RR ing is fun!' | Made in the PCR, / Coast Div, NMRA
Document: Red | Red | Red | Red | Red | Red | Red | Red | Red | Red
_tNames: R1 | R2 | R3 | R4 | R1 | R2 | R3 | R4 | R1 | R2 | R3 | R4 | R1 | R2 | R3 | R4 | R1 | R2 | R3 | R4 | C1 | C2 | C3 | C4 | C1 | C2 | C3 | C4 | C1 | C2 | C3 | C4 | C1 | C2 | C3 | C4 | C1 | C2 | C3 | C4 | D1 | D2 | D3 | D4 | D1 | D2 | D3 | D4 | D1 | D2 | D3 | D4 | D1 | D2 | D3 | D4 | D1 | D2 | D3 | D4 | R5 | R6 | R7 | R8 | R5 | R6 | R7 | R8 | R5 | R6 | R7 | R8 | R5 | R6 | R7 | R8 | R5 | R6 | R7 | R8 | JP1 | JP1 | JP1 | JP1 | JP1 | R1 | R2 | R3 | R4 | R1 | R2 | R3 | R4 | R1 | R2 | R3 | R4 | R1 | R2 | R3 | R4 | R1 | R2 | R3 | R4 | C1 | C2 | C3 | C4 | C1 | C2 | C3 | C4 | C1 | C2 | C3 | C4 | C1 | C2 | C3 | C4 | C1 | C2 | C3 | C4 | D1 | D2 | D3 | D4 | D1 | D2 | D3 | D4 | D1 | D2 | D3 | D4 | D1 | D2 | D3 | D4 | D1 | D2 | D3 | D4 | R5 | R6 | R7 | R8 | R5 | R6 | R7 | R8 | R5 | R6 | R7 | R8 | R5 | R6 | R7 | R8 | R5 | R6 | R7 | R8 | JP1 | JP1 | JP1 | JP1 | JP1